# Altium PCB WIGGLER.PcbDoc
Units mil, origin at the board's own origin, x right, y up, seen from the top; angles counter-clockwise.
Board outline 1450 x 1240 mil, 2 copper layers (Top Layer, Bottom Layer); 28 components, 42 nets, 118 pads, 13 vias.
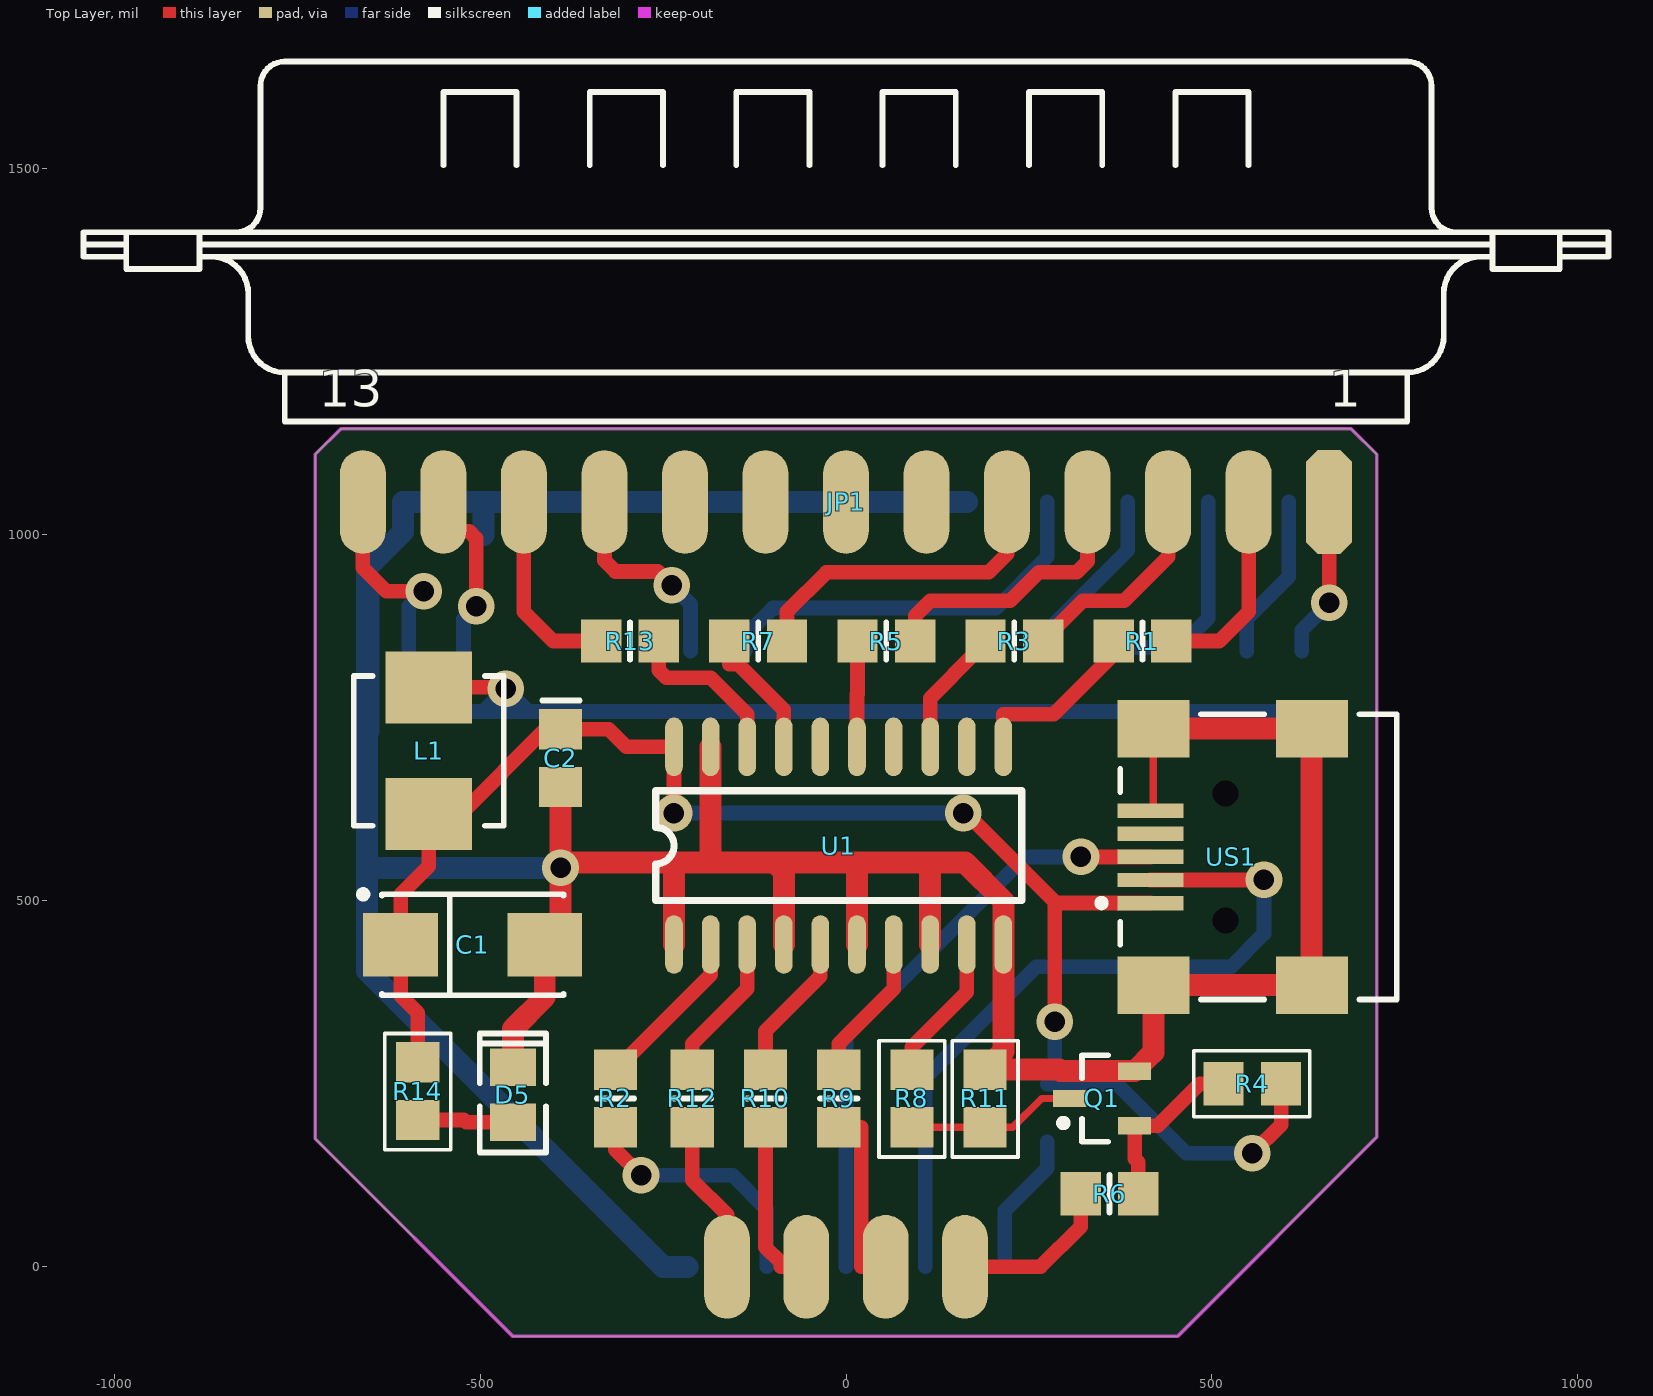
[diagram p0: Top Layer view]
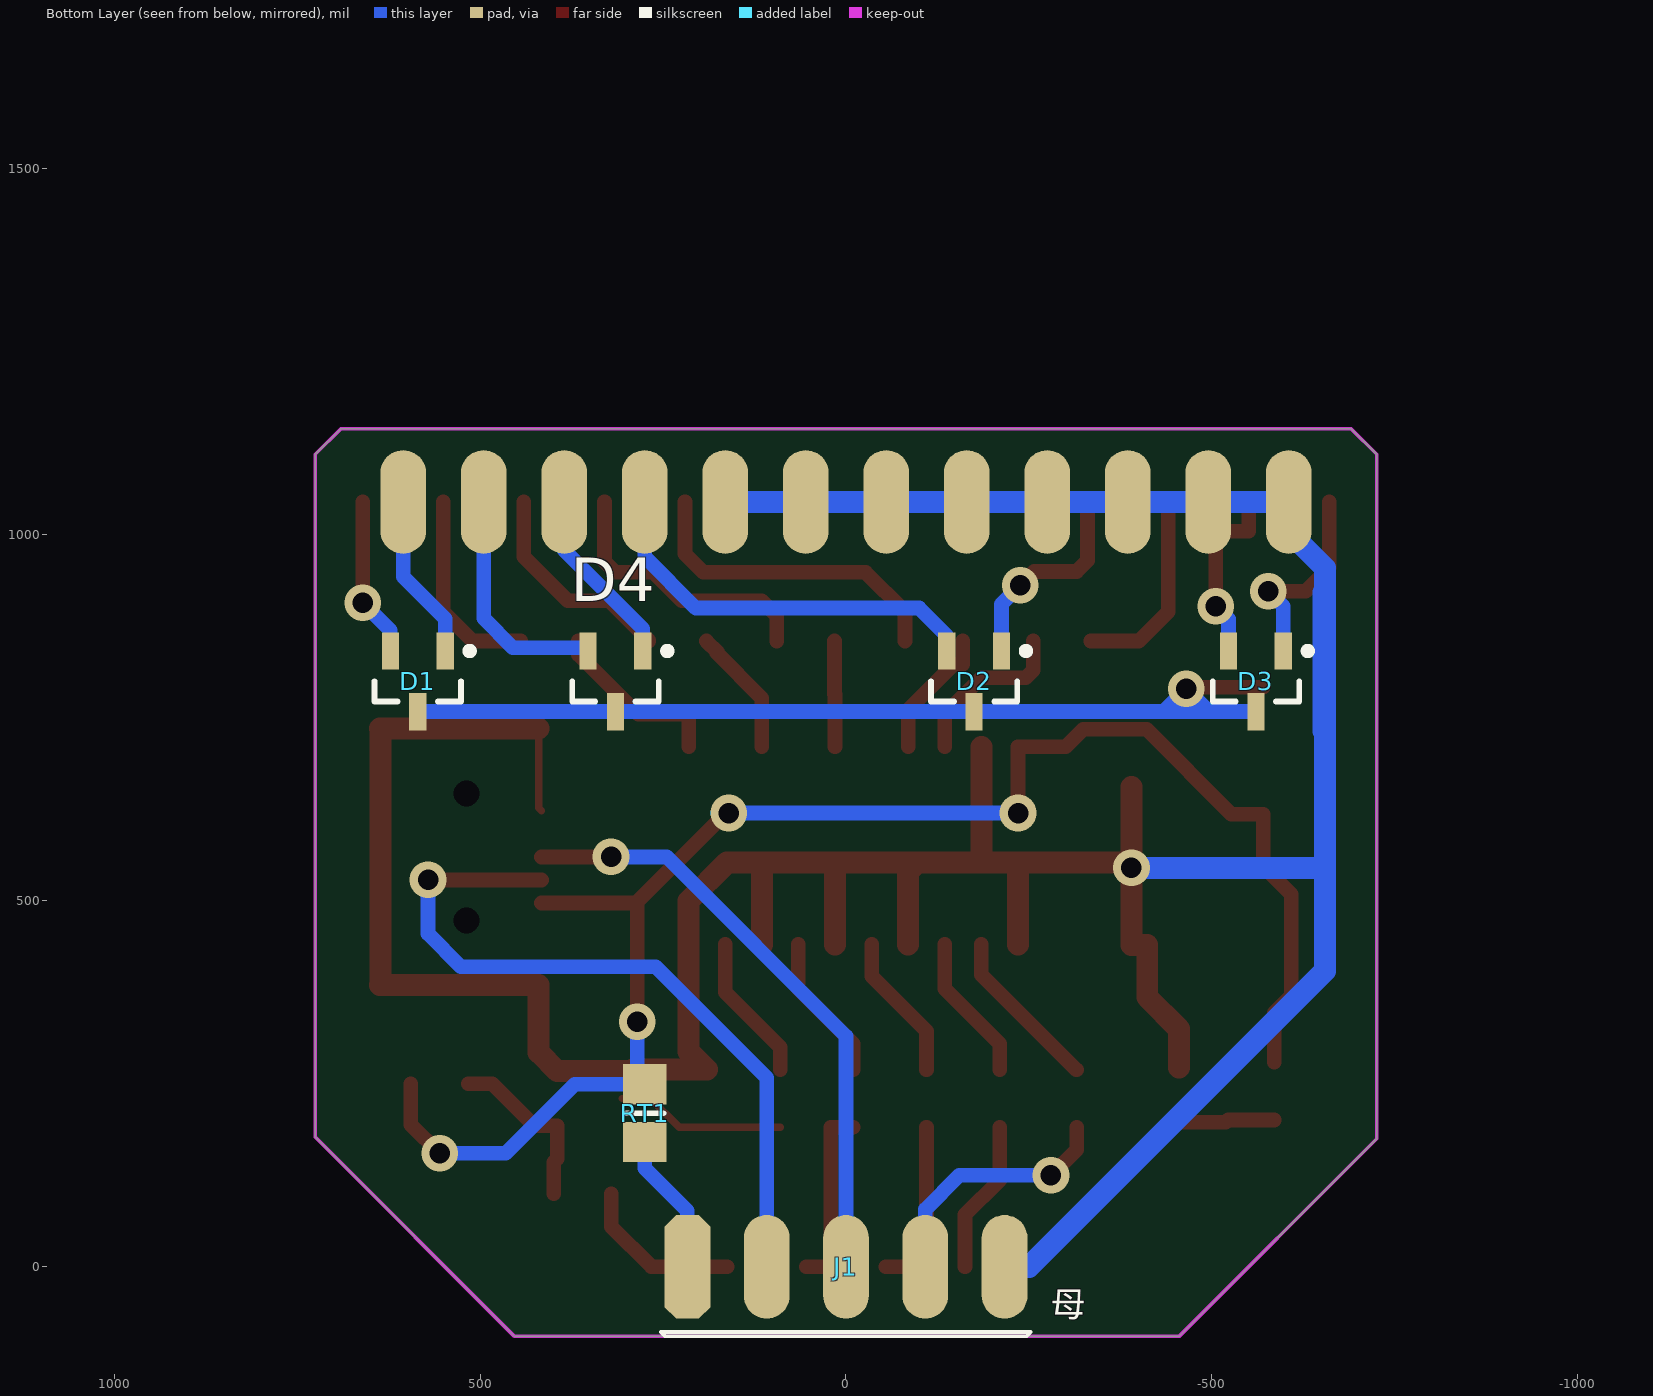
[diagram p1: Bottom Layer view, seen from below]

## Layer stack, top to bottom
Top Layer: signal copper 1.4
Dielectric: dielectric 12.6, FR-4, Dk 4.8
Bottom Layer: signal copper 1.4

## Board outline
-725,175 -725,1110 -690,1145 690,1145 725,1110 725,177.24 452.76,-95 -455,-95

## Design rules (kind name [scope] priority, off if disabled: settings)
Clearance [All] p1: gap=10
PolygonConnect [All] p1: connectstyle=Relief reliefconductorwidth=10 reliefentries=4 polygonreliefangle="90 Angle"
RoutingVias [All] p1: holewidth=28 width=50 viastyle="Through Hole" minholewidth=28 minwidth=50 maxholewidth=28 maxwidth=50
SilkscreenOverComponentPads [All] p1: minsilkscreentomaskgap=10
SolderMaskExpansion [All] p1: expansion=4
Width Width_2 [(InNet('VCC') OR InNet('VDD') OR InNet('VDD5V'))] p1: maxlimit=20 minlimit=10 preferedwidth=20
Width Width_1 [InNet('GND')] p2: maxlimit=30 minlimit=10 preferedwidth=30
Width [All] p3: maxlimit=20 minlimit=10 preferedwidth=20
27 further rules are at their usual default settings.

## Components (designator, comment, footprint, x,y, rotation, side; value= is the part's Value field where it differs from the comment)
C1 "47U" 6032 -510,440 r0 top
C2 "104" 0805C -390,695 r270 top
D1 "BAT54C" SOT23_N#1 585,800 r270 bottom
D2 "BAT54C" SOT23_N#1 -175,800 r270 bottom
D3 "BAT54C" SOT23_N#1 -560,800 r270 bottom
D4 "BAT54C" SOT23_N#1 315,800 r270 bottom
D5 "POWER" "SMD _LED" -455,235 r270 top
J1 "DB9" DB9Male 0,0 r0 bottom
JP1 "DB25" DB25SSM 0,1045 r0 top
L1 "Inductor Iron Dot" INDP5050X28N -570,705 r270 top
Q1 "9013" SOT23_N#2 350,230 r180 top
R1 "100R" 6-0805_M 405,855 r0 top
R2 "100R" 6-0805_M -315,230 r90 top
R3 "100R" 6-0805_M 230,855 r0 top
R4 "10K" 0805R 555,250 r180 top
R5 "100R" 6-0805_M 55,855 r0 top
R6 "100R" 6-0805_M 360,100 r0 top
R7 "100R" 6-0805_M -120,855 r0 top
R8 "10K" 0805R 90,230 r270 top
R9 "100R" 6-0805_M -10,230 r90 top
R10 "100R" 6-0805_M -110,230 r90 top
R11 "10K" 0805R 190,230 r270 top
R12 "100R" 6-0805_M -210,230 r90 top
R13 "100R" 6-0805_M -295,855 r180 top
R14 "10K" 0805R -585,240 r270 top
RT1 "0R" 6-0805_M 275,210 r270 bottom
U1 "74HC244" SOJ-20 -235,440 r90 top
US1 "USB-B" USB/SM0.8-6H5 725,560 r0 top

## Footprints (in the part's own frame and the unit in brackets; to place one, negate y for a bottom-side part, rotate by r counter-clockwise, add the part's x,y. Pads: shape width x height; smd on the part's side, far side on the other; paste and mask are expansions set on the pad)
6-0805_M [mm] "Chip Resistor, Body 2.0x1.2mm, IPC Low Den"
  rect 1.4x1.5 smd: 1(-1,0) 2(1,0)
  silkscreen extent 0,-0.65 0,0.65, body extent -1.07,-0.7 1.07,0.7, height 0.7
0805C [mm] "Chip Resistor, Body 2.0x1.2mm, IPC Low Density"
  rect 1.4x1.5 smd: 1(-1,0) 2(1,0)
  silkscreen extent -2,-0.64 -2,0.67, body extent -1.07,-0.7 1.07,0.7, height 0.7
0805R [mm] "Chip Resistor, Body 2.0x1.2mm, IPC Low Den"
  rect 1.4x1.5 smd: 1(-1,0) 2(1,0)
  silkscreen extent -2,-1.14 2.03,1.14, body extent -1.07,-0.7 1.07,0.7, height 0.7
6032 [mm] "Capacitor, SM Tantalum; Body 6.0 x 3.2 mm (LxW typ)"
  rect 2.6x2.2 smd: 1(-2.5,0) 2(2.5,0)
  silkscreen extent -3.92,-1.75 3.15,1.87, body extent -3.13,-1.56 3.05,1.65, height 2.22
DB9Male [mil]
  oct 62.5x141.67 smd: 1(216.67,0)
  oval 62.5x141.67 smd: 2(108.33,0) 3(0,0) 4(-108.33,0) 5(-216.67,0)
  oval 62.5x141.67 smd far side: 6(162.5,0) 7(54.17,0) 8(-54.17,0) 9(-162.5,0)
  silkscreen extent -252,89 253,95
DB25SSM [mil]
  oct 62.5x141.67 smd: 1(660,0)
  oval 62.5x141.67 smd: 2(550,0) 3(440,0) 4(330,0) 5(220,0) 6(110,0) 7(0,0) 8(-110,0) 9(-220,0) 10(-330,0) 11(-440,0) 12(-550,0) 13(-660,0)
  oval 62.5x141.67 smd far side: 14(605,0) 15(495,0) 16(385,0) 17(275,0) 18(165,0) 19(55,0) 20(-55,0) 21(-165,0) 22(-275,0) 23(-385,0) 24(-495,0) 25(-605,0)
  silkscreen extent -1042,110 1042,602
INDP5050X28N [mm]
  rect 2.5x3 smd: 1(-2.2,0) 2(2.2,0)
  silkscreen extent -2.6,-2.6 2.6,2.6, body extent -1.56,-1.53 1.51,1.54, height 2
"SMD _LED" [mm]
  rect 1.3x1.6 smd: 1(0.95,0) 2(-0.95,0)
  silkscreen extent -2.13,-1.15 2,1.15
SOJ-20 [mil]
  oval 80x24 smd: 1(0.41,-0.01) 2(0.41,-50.01) 3(0.41,-100.01) 4(0.41,-150.01) 5(0.41,-200.01) 6(0.41,-250.01) 7(0.41,-300.01) 8(0.41,-350.01) 9(0.41,-400.01) 10(0.41,-450.01) 11(270.41,-450.01) 12(270.41,-400.01) 13(270.41,-350.01) 14(270.41,-300.01) 15(270.41,-250.01) 16(270.41,-200.01) 17(270.41,-150.01) 18(270.41,-100.01) 19(270.41,-50.01) 20(270.41,-0.01)
  silkscreen extent 60,-475 210,25
SOT23_N#1 [mm] "SOT23, 3-Leads, Body 2.9x1.3mm, Pitch 0.95mm, Lead Span 2.3mm, IPC Medium Density"
  rect 1.3x0.6 smd: 1(-1.05,0.95) 2(-1.05,-0.95) 3(1.05,0)
  silkscreen extent -1.17,-1.5 0.7,1.92, body extent -0.7,-1.5 0.7,1.5, height 1.1
SOT23_N#2 [mm] "SOT23, 3-Leads, Body 2.9x1.3mm, Pitch 0.95mm, Lead Span 2.3mm - Reverse Pinning, IPC Medium Density"
  rect 1.15x0.6 smd: 1(1.125,0) 2(-1.125,-0.95) 3(-1.125,0.95)
  silkscreen extent -0.2,-1.5 1.47,1.5, body extent -0.7,-1.5 0.7,1.5, height 1.1
USB/SM0.8-6H5 [mm] "Connector; USB2.0, Type B, SM; 5 Position; Right Angle"
  rect 2.3x0.5 smd: 1(-7.85,-1.6) 2(-7.85,-0.8) 3(-7.85,0) 4(-7.85,0.8) 5(-7.85,1.6)
  rect 2.5x2 smd: 6(-7.75,4.45) 7(-2.25,4.45) 8(-7.75,-4.45) 9(-2.25,-4.45)
  round 0.6 hole 0.9 unplated: MH1(-5.25,2.2) MH2(-5.25,-2.2)
  silkscreen extent -9.67,-4.95 0.7,4.95, body extent -8.9,-4.95 0.7,4.95, height 3.9

## Part data
C1: library part "CAPACITOR POL", "Capacitor"
C2: library part CAP, "Capacitor"
D1 D2 D3 D4: "Schottky Barrier Double Diode"
D5: library part MYLED
L1: "Magnetic-Core Inductor with Winding Polarity Marking"
Q1: library part NPN, "NPN Transistor"
R1 R2 R3 R4 R5 R6 R7 R8 R9 R10 R11 R12 R13 R14 RT1: library part RES, "电阻"
U1: library part 74LS244
US1: library part D-300-0034, "USB On-The-Go (OTG) Mini-B Receptacle, Right Angle, SMT, 0.80mm (.031\") Pitch, Solder Tabs with Back Cover, Recessed Type"

## Via types
v1: diameter 50, hole 28, Top Layer to Bottom Layer, 13 vias

## Nets (pads, with @x,y where several pads share a name; then routed paths per layer and width w, separated by ;. In a path a pad name is that pad's centre, name@x,y a point inside that pad or via, vN(x,y) a via of type N, cw(c..) or ccw(c..) an arc to the next point about the centre after c; other vN are vias at no path point)
1: D1.2 JP1.1 | length 219.2
  Top Layer w20: v1(660,907) JP1.1
  Bottom Layer w20: D1.2 622.4,869.4 v1(660,907)
2: JP1.2 R1.2 | length 272.2
  Top Layer w20: R1.2 510,855 550,895 JP1.2
3: JP1.3 R3.2 | length 293.8
  Top Layer w20: R3.2 269.37,855.9 323.47,910 380,910 440,970 JP1.3
4: JP1.4 R5.2 | length 381.9
  Top Layer w20: R5.2 94.37,889.37 115,910 224.54,910 263.54,949 315,949 330,964 JP1.4
5: JP1.5 R7.2 | length 444.4
  Top Layer w20: R7.2 -80.63,895 -26.63,949 195,949 220,974 JP1.5
6: JP1.6
7: JP1.7
8: JP1.8
9: JP1.9
10: D2.1 JP1.10 | length 286.3
  Top Layer w20: JP1.10 -330,965 -315,950 -257,950 v1(-238,931)
  Bottom Layer w20: v1(-238,931) -212.4,905.4 D2.1
11: JP1.11 R13.2 | length 272.2
  Top Layer w20: JP1.11 -440,895 -400,855 R13.2
12: D3.2 JP1.12 | length 250.1
  Top Layer w20: JP1.12 -550,1005 -515,1005 -505,995 v1(-505,902.6)
  Bottom Layer w20: D3.2 -522.6,885 v1(-505,902.6)
13: D3.1 JP1.13 | length 276.4
  Top Layer w20: JP1.13 -660,955 -628,923 v1(-577,923)
  Bottom Layer w20: D3.1 -597.4,902.6 v1(-577,923)
14: D1.1 JP1.14 | length 227.4
  Bottom Layer w20: D1.1 547.6,885.6 605,943 JP1.14
15: D4.2 JP1.15 | length 322.8
  Bottom Layer w20: D4.2 352.4,846 455,846 495,886 JP1.15
16: D4.1 JP1.16 | length 248.1
  Bottom Layer w20: D4.1 277.6,871.6 385,979 JP1.16
17: D2.2 JP1.17 | length 553.2
  Bottom Layer w20: D2.2 -137.6,862.4 -100,900 205,900 275,970 JP1.17
DN1/PDN0: J1.2 US1.2 | length 1031.7
  Top Layer w20: US1.2 570.5,528.5 v1(571,529)
  Bottom Layer w20: J1.2 108.33,258.33 260,410 526,410 571,455 v1(571,529)
DP1/PDP0: J1.3 US1.3 | length 832.4
  Top Layer w20: v1(321,560) US1.3
  Bottom Layer w20: J1.3 0,315 245,560 v1(321,560)
GND: C1.2 C2.2 D5.2 J1.5 JP1.18 JP1.19 JP1.20 JP1.21 JP1.22 JP1.23 JP1.24 JP1.25 Q1.2 R11.1 U1.1 U1.4 U1.6 U1.8 U1.10 U1.19 US1.5 US1.6 US1.7 US1.8 US1.9 | length 5658
  Top Layer w10: US1.5 419.88,626.93 US1.6
  Top Layer w30: D5.2 -455,325 -411.58,368.42 C1.2 -390,440 v1(-390,545) ; C2.2 v1(-390,545) ; U1.1 -234.99,552.5 ; -184.99,555 U1.19 ; U1.4 -84.99,540 -97.5,552.5 ; U1.6 15.01,547.51 ; U1.8 115.01,552.5 ; US1.6 US1.7@636,735.2 ; US1.9 US1.9@636,384.8 ; US1.7 US1.7@636,735.2 ; v1(-390,545) -382.5,552.5 -234.99,552.5 ; -234.99,552.5 -97.5,552.5 ; -97.5,552.5 162.5,552.5 215.01,499.99 U1.10 215.01,294.38 R11.1 291,269.37 292.97,267.4 Q1.2 419.88,292.99 US1.8 US1.9@636,384.8 ; US1.9@636,384.8 US1.7@636,735.2
  Bottom Layer w30: -652,732 -652,921.6 ; -649.2,545 v1(-390,545) ; JP1.24@-495,1000 JP1.24 ; J1.5 -250,0 -654.2,404.2 -654.2,955 -605,1004.2 JP1.25 JP1.24 ; JP1.18 JP1.19 JP1.20 JP1.21 JP1.22 JP1.23 JP1.24
NetD5_1: D5.1 R14.2 | length 131.3
  Top Layer w20: R14.2 -522,200.63 -518.97,197.6 D5.1
NetQ1_1: Q1.1 R8.2 R11.2 | length 232
  Top Layer w10: R8.2 R11.2 228,190.63 267.37,230 Q1.1
NetQ1_2: Q1.3 R4.2 R6.2 | length 239.8
  Top Layer w20: R6.2 399.37,143 394.29,148.08 Q1.3 426,192.6 483.4,250 R4.2
NetR2_2: R2.2 U1.2 | length 225.1
  Top Layer w20: R2.2 -314.62,269.37 -184.99,399 U1.2
NetR8_1: R8.1 U1.9 | length 202.1
  Top Layer w20: R8.1 90,300 165.01,375.01 U1.9
NetR9_2: R9.2 U1.7 | length 202.1
  Top Layer w20: R9.2 -10,305 65.01,380.01 U1.7
NetR10_2: R10.2 U1.5 | length 202.1
  Top Layer w20: R10.2 -110,322 -34.99,397.01 U1.5
NetR12_2: R12.2 U1.3 | length 202.1
  Top Layer w20: R12.2 -210,305 -134.99,380.01 U1.3
NRESET: 
NTRST: J1.6 R6.1 | length 225.9
  Top Layer w20: J1.6 265.63,0 320.63,55 R6.1
RST: R1.1 U1.11 | length 247.4
  Top Layer w20: U1.11 215.01,755 284,755 365.63,836.63 R1.1
TCK: R5.1 U1.15 | length 144.9
  Top Layer w20: U1.15 15.01,782 15.63,782.62 R5.1
TCK-0: J1.8 R10.1 | length 234.2
  Top Layer w20: R10.1 -110,27 -89,6 -89,0 J1.8
TDI: R7.1 U1.17 | length 182.6
  Top Layer w20: R7.1 -159.37,823 -147,823 -84.99,760.99 U1.17
TDI-0: J1.9 R12.1 | length 210.3
  Top Layer w20: R12.1 -210,118.5 -162.5,71 J1.9
TDO: R13.1 U1.18 | length 230.1
  Top Layer w20: R13.1 -255.63,815 -245.63,805 -185,805 -134.99,754.99 U1.18
TDO-0: J1.4 R2.1 | length 349.5
  Top Layer w20: R2.1 -315,160 v1(-280,125)
  Bottom Layer w20: v1(-280,125) -155,125 -108.33,78.33 J1.4
TMS: R3.1 U1.13 | length 179.3
  Top Layer w20: U1.13 115.01,777 177.5,839.5 175.13,839.5 R3.1
TMS-0: J1.7 R9.1 | length 254.8
  Top Layer w20: R9.1 21,190.63 21,0 J1.7
VCC: C1.1 C2.1 L1.2 R4.1 R14.1 RT1.1 U1.20 US1.1 | length 2246.7
  Top Layer w20: R14.1 -585,347 -608.43,370.43 C1.1 -608.43,509 -570,547.43 L1.2 -526.61,618.39 -410.63,734.37 C2.1 -324.37,734.37 -300.41,710.41 U1.20 v1(-234.99,620) ; v1@162.01,622.01 287.01,497.01 ; v1(285,335) 285,495 287.01,497.01 ; US1.1 287.01,497.01 ; v1(555,155) 594.37,194.37 R4.1
  Bottom Layer w20: v1(-234.99,620) v1@175,620 ; v1(285,335) 285,259.37 RT1.1 370.63,249.37 465,155 v1(555,155)
  other v1: 160,620
VDD: D1.3 D2.3 D3.3 D4.3 L1.1 | length 1383
  Top Layer w20: L1.1 -466.61,791.61 v1(-465,790)
  Bottom Layer w20: D3.3@-560,771 D3.3 -496.34,758.66 ; D1.3 D4.3 D2.3 -433.66,758.66 ; -496.34,758.66 -465,758.66 ; -496.34,758.66 v1(-465,790) ; -465,758.66 -433.66,758.66 ; -465,758.66 v1(-465,790) ; v1(-465,790) -433.66,758.66
VDD5V: J1.1 RT1.2 | length 194.8
  Bottom Layer w20: J1.1 216.67,76.67 275,135 RT1.2
pads on no net: U1.12 U1.14 U1.16 US1.4 US1.MH1 US1.MH2

## Polygon pours and split planes (outlines as drawn)
GND on Top Layer "Bottom Layer-No Net" (solid, shelved, pour order 3): -455,-95 -725,175 -725,1110 -690,1145 690,1145 725,1110 725,177.24 452.76,-95 -455,-95
GND on Bottom Layer "Bottom Layer-No Net" (solid, shelved, pour order 4): -455,-95 -725,175 -725,1110 -690,1145 690,1145 725,1110 725,177.24 452.76,-95 -455,-95

## Keep-outs
Keep-Out Layer:
  the board outline again, w5

## Text inside footprints (layer, text, board x,y; h text height)
J1: Bottom Overlay "母" at -280,-80 h60
JP1: Top Overlay "1" at 660,1175 h50; Top Overlay "13" at -720,1175 h50
US1: Mechanical 1 "PCB Edge" at 742.02,401.09 h9.84 r90